# Altium PCB lampi_pcb -V3.PcbDoc
Units mil, origin at the board's own origin, x right, y up, seen from the top; angles counter-clockwise.
Board outline 1965 x 1570 mil, 2 copper layers (Top Layer, Bottom Layer); 39 components, 24 nets, 124 pads, 34 vias.
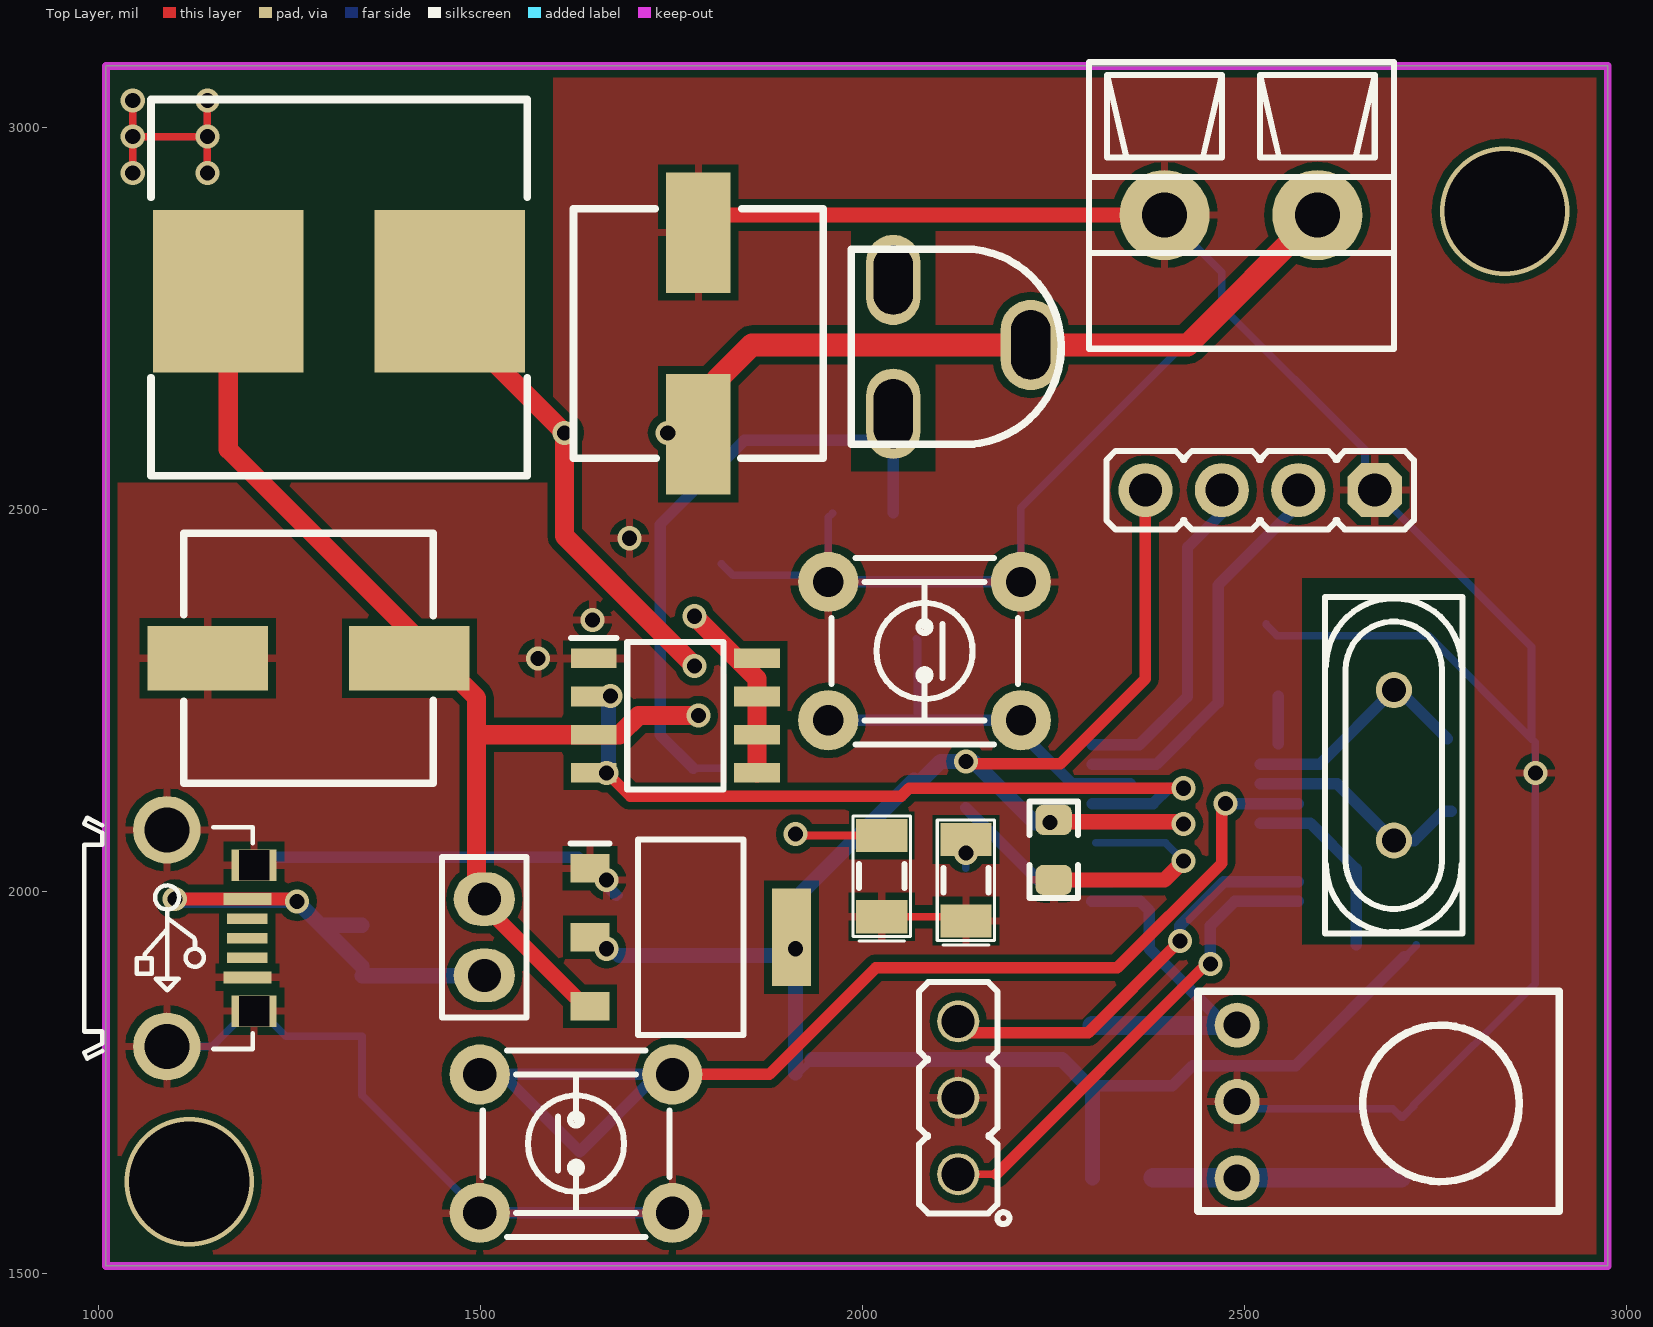
[diagram p0: Top Layer view]
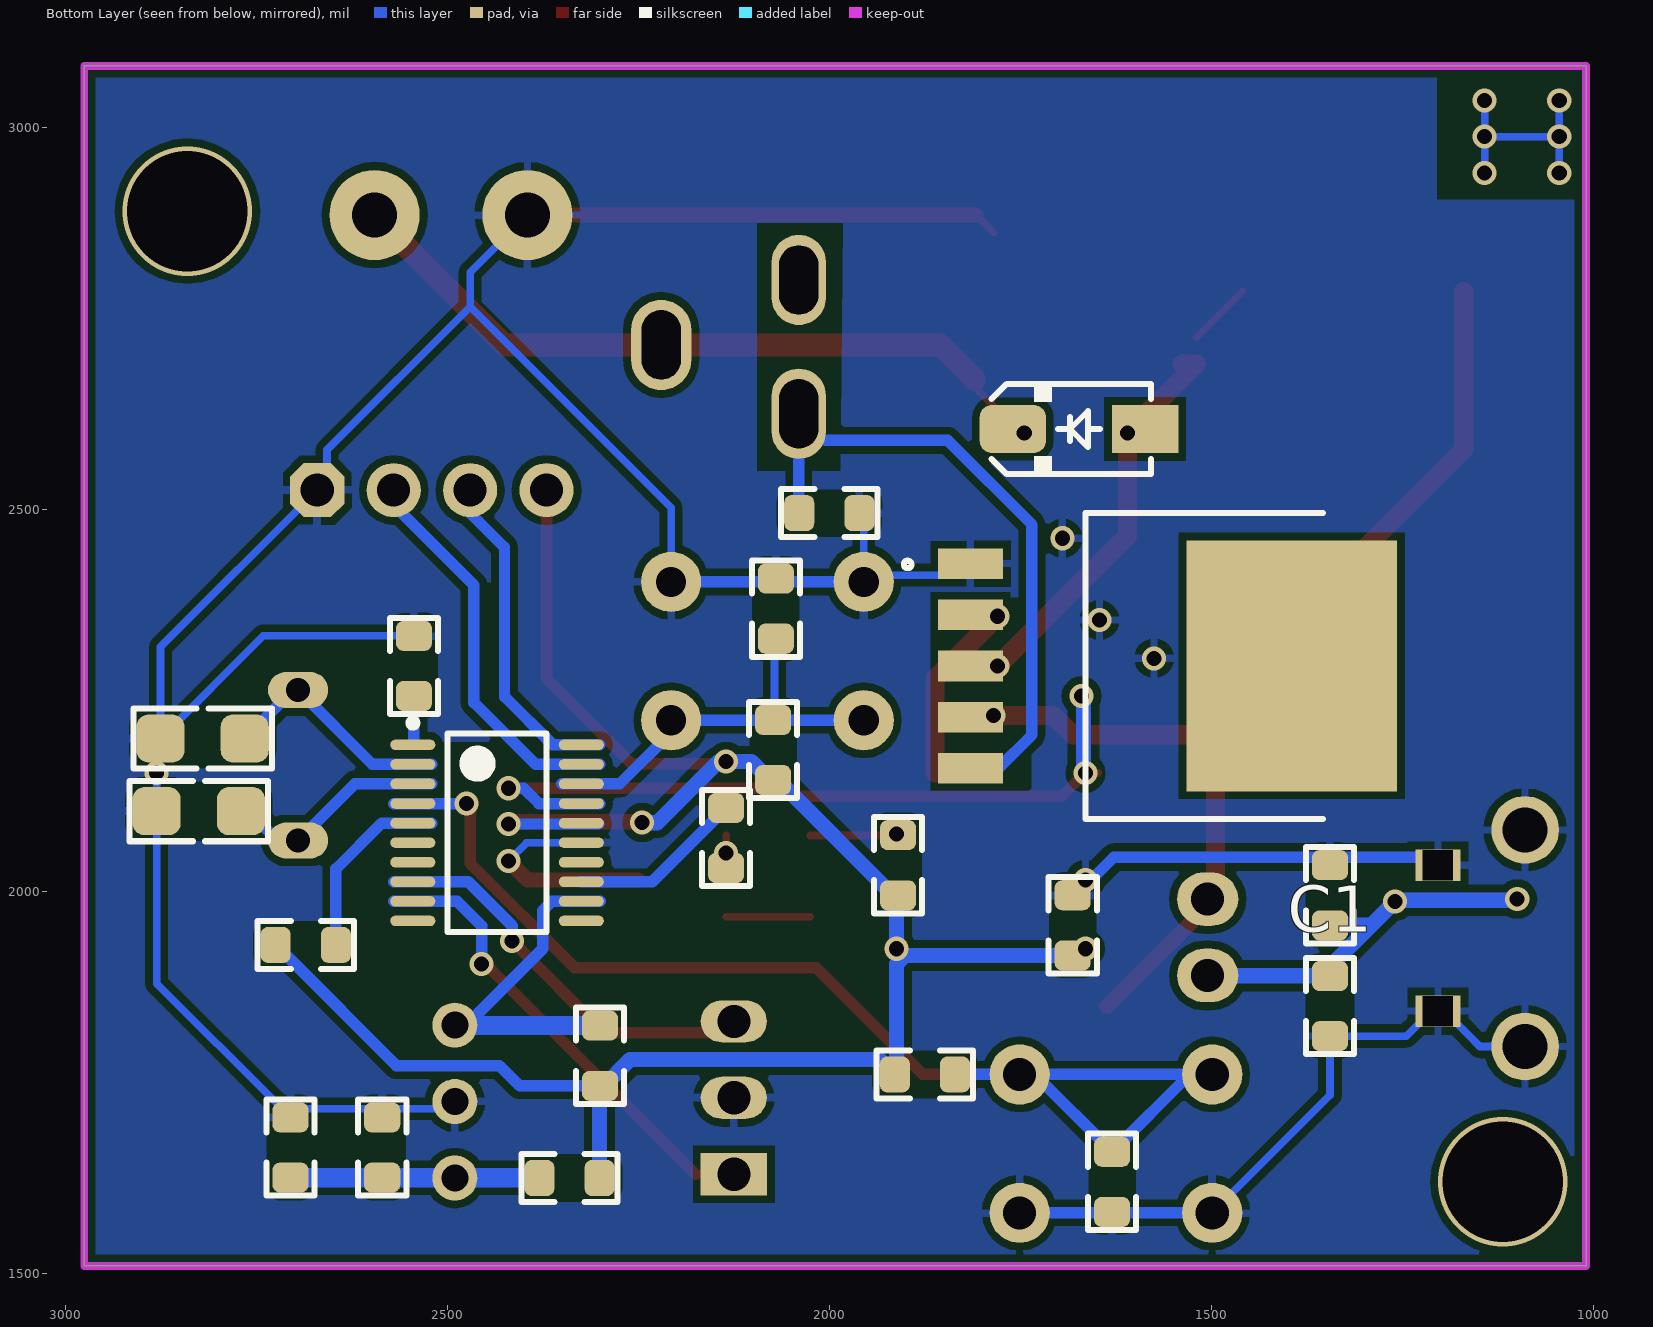
[diagram p1: Bottom Layer view, seen from below]
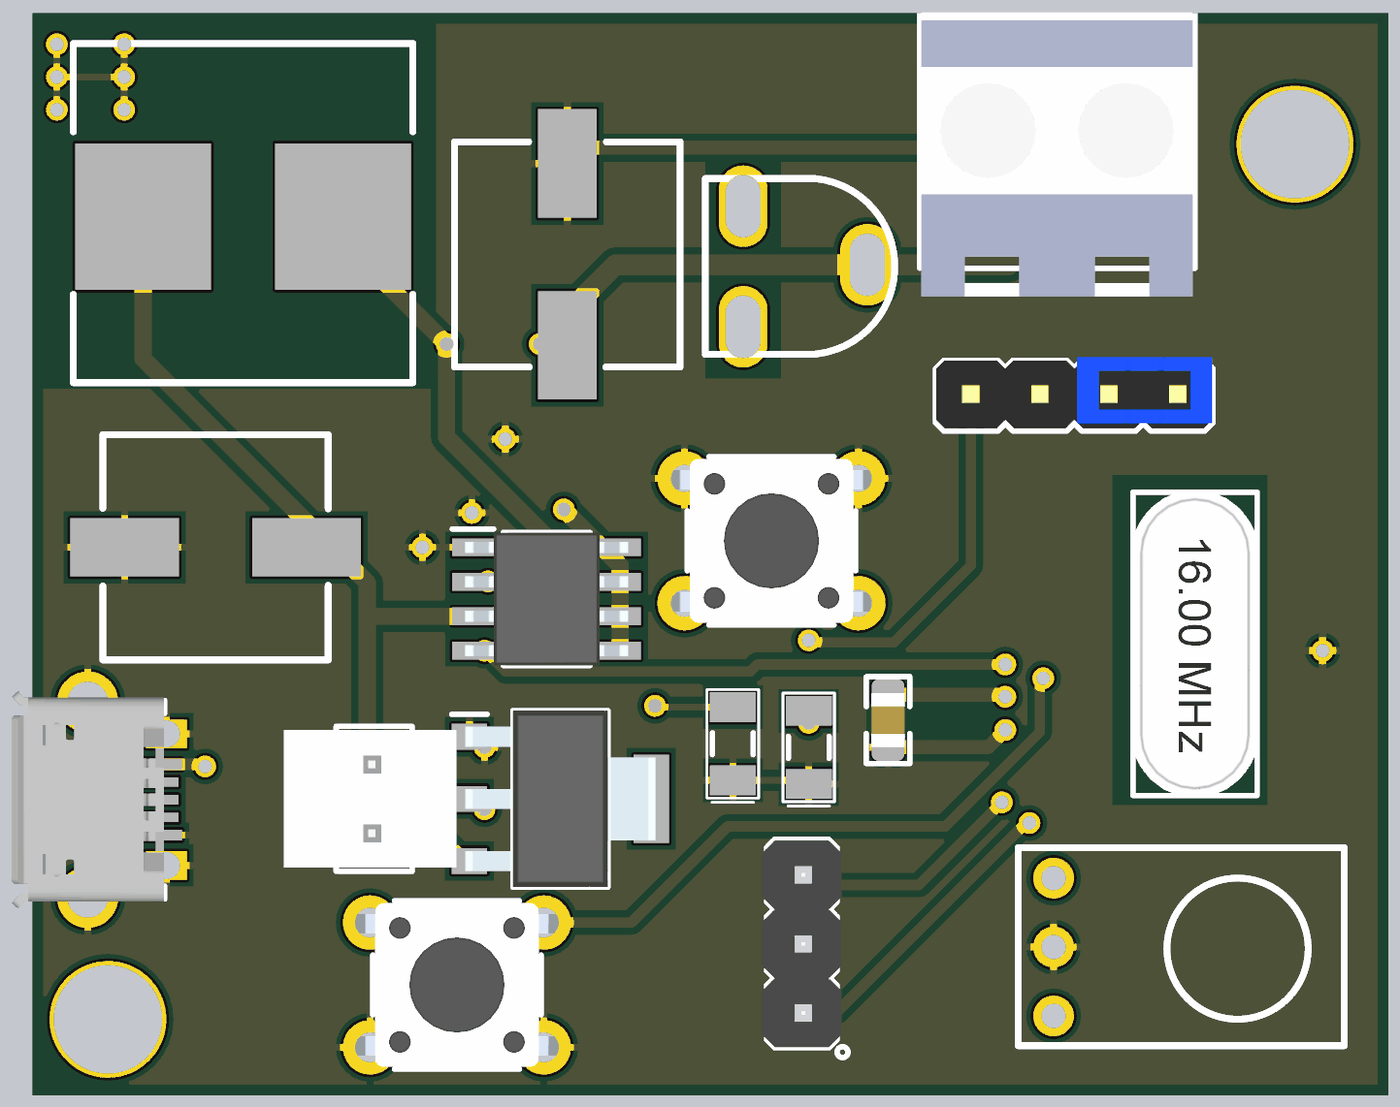
[diagram p2: 3D render of the assembled board from above, using the file's embedded part models]
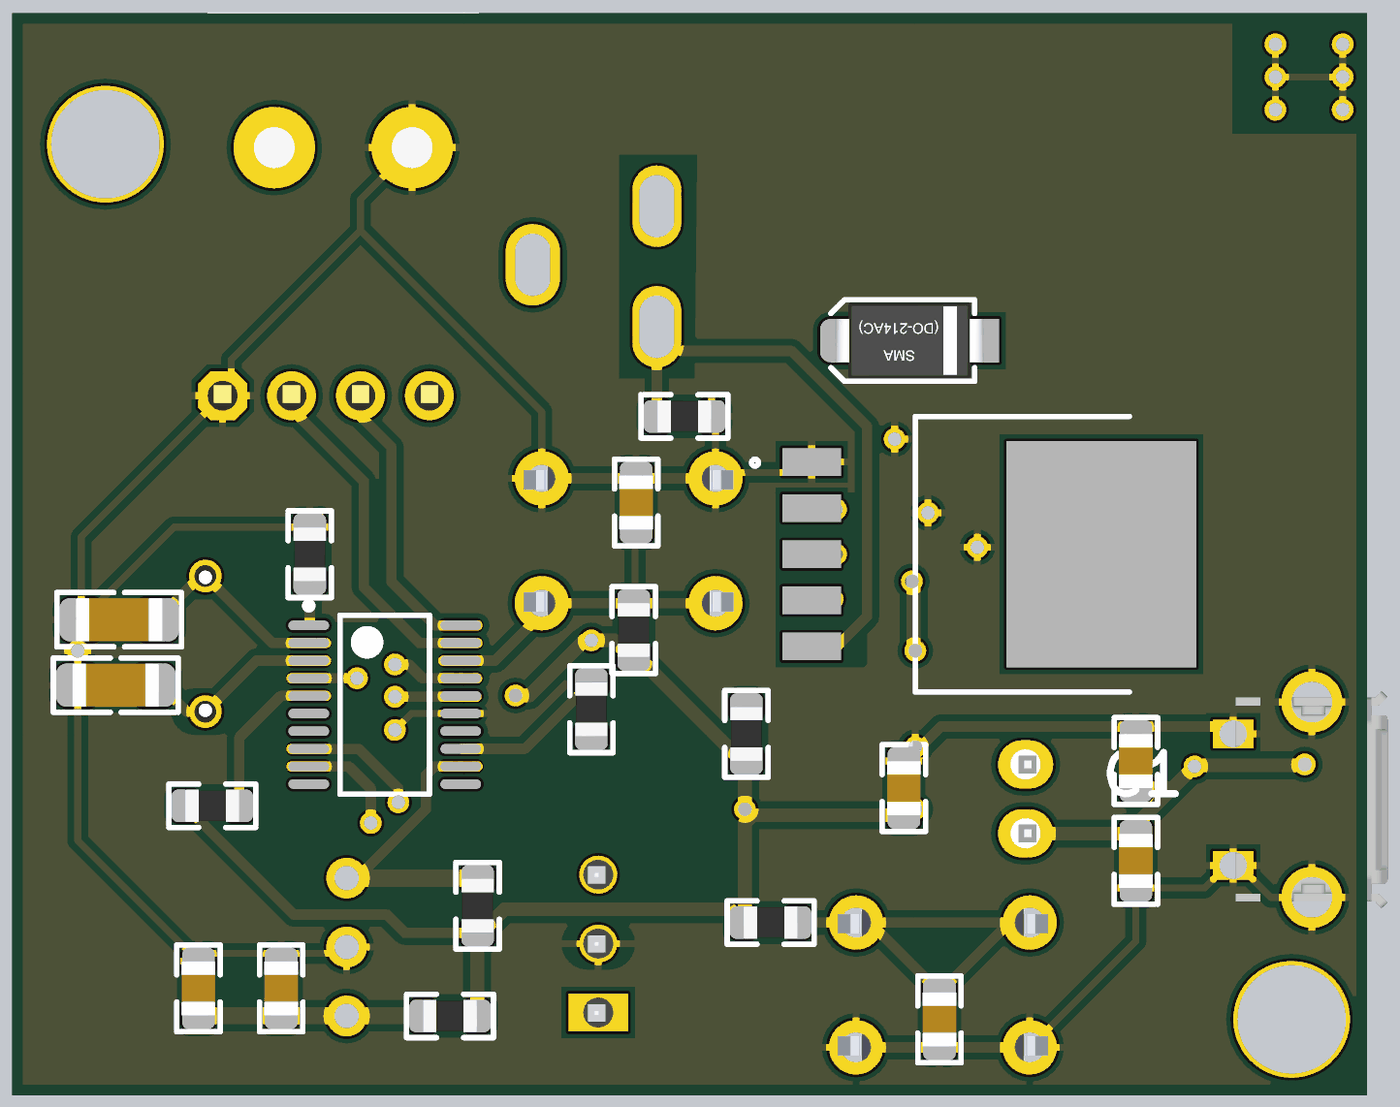
[diagram p3: 3D render of the assembled board from below, using the file's embedded part models]

## Layer stack, top to bottom
Top Solder: solder mask 0.4, Solder Resist, Dk 3.5
Top Layer: signal copper 1.4
Dielectric 1: dielectric 12.6, FR-4, Dk 4.8
Bottom Layer: signal copper 1.4
Bottom Solder: solder mask 0.4, Solder Resist, Dk 3.5

## Board outline
1010,1510 2975,1510 2975,3080 1010,3080

## Design rules (kind name [scope] priority, off if disabled: settings)
Clearance [All] p1: gap=10 ignorepadtopadclearanceinfootprint=FALSE except(0: Arc-Hole Track-Hole SMDPad-Hole THPad-Hole Via-Hole Fill-Hole Poly-Hole Region-Hole Text-Hole)
PolygonConnect [All] p1: connectstyle=Relief reliefconductorwidth=10 reliefentries=4 polygonreliefangle="90 Angle" airgapwidth=10
RoutingVias [All] p1: holewidth=28 width=50 viastyle="Through Hole" minholewidth=28 minwidth=50 maxholewidth=28 maxwidth=50
SolderMaskExpansion [All] p1: expansion=4
Width [All] p1: maxlimit=30 minlimit=10 preferedwidth=10 minimp=50.000000 maximp=50.000000 favimp=50.000000
30 further rules are at their usual default settings.

## Classes and differential pairs
component class Lampi: C1
component class lampi_power: " "

## Components (designator, comment, footprint, x,y, rotation, side; value= is the part's Value field where it differs from the comment)
C1 "100nF" 0805C 1345,1850 r90 bottom
C2 "100nF" 0805C 1681.61,1955.63 r270 bottom
C3 "20pF" 1206C 2820,2200 r0 bottom
C4 "10uF" 0805C 1345,1995 r270 bottom
C5 "20pF" 1206C 2825,2105 r0 bottom
C6 "100nF" 0805C 2070,2370 r270 bottom
C7 "100nF" 0805C 1630,1620 r90 bottom
C8 "100nF" 0805C 2250,2054.37 r90 top
C9 "100nf" 0805C 2705,1665 r90 bottom
C10 "10uf" 0805C 2585,1665 r90 bottom
C11 "C 220uF" UWT(8X10) 1275,2305 r180 top
C12 "100uF" UWT(8X10) 1785,2730 r90 top
D1 "LED" L1206 2025,2020 r270 top
D2 "LED" L1206 2135,2014.65 r270 top
D3 "1N5819" 430X270D 1673.39,2605 r0 bottom
"header 1" "HDR_BUSEL" HDR_1x3 2125,1730 r90 top
IC1 "ams1117-3.3v" SOT229P700X180-4N 1775,1940 r0 top
IC? "XL6009" KTT0005B 1324.68,2295 r0 bottom
J1 "Terminal" TB_2 2495,2885 r180 top
J5 "" HEADER_4_JMP 2520,2525 r180 top
JP1 "Header 2" "COMM HEADER 2" 1505,1940 r90 top
L1 "33UH" SRR1260-150M 1315,2790 r0 top
PT1 "POT3" POT3 1985,2840 r270 top
Q1 "IRF7317PBF" SOIC127P600X175-8N 1755,2230 r0 top
R1 "10k" 0805L 2073.5,2185 r270 bottom
R2 "10k" 0805L 1875,1760.55 r0 bottom
R3 "100" 0805L 2543.5,2295 r270 bottom
R4 "0" 0805L 2685,1930 r180 bottom
R5 "100" 0805L 1910,2034.29 r270 bottom
R6 "100" 0805L 2135,2070 r90 bottom
R7 "100R" 0805L 2340,1625 r180 bottom value=100r
R8 "22K OPTIONAL" 0805L 2300,1785 r90 bottom
"R 1k" "*" 0805L 2000,2495 r0 bottom
SM1 "PUSHBUTTON" PBTHD_4_6X6MM#1 2080.98,2314.45 r180 top
SM2 "PUSHBUTTON" PBTHD_4_6X6MM#2 1625,1670 r0 top
U1 "STM32F030F4P6" STM-TSSOP20_L 2434.76,2076.61 r180 bottom
uUSB "micro usb dip" MICRO_USB_DIP 1090.04,1938.82 r270 top
XM1 "8MHz" XTLT_2 2695,2165 r270 top
? "RYS1838T" RYS1838T 2709.49,1722.64 r270 top

## Footprints (in the part's own frame and the unit in brackets; to place one, negate y for a bottom-side part, rotate by r counter-clockwise, add the part's x,y. Pads: shape width x height; smd on the part's side, far side on the other; paste and mask are expansions set on the pad)
430X270D [mm] "SMA Molded Diode, 2-Leads, Body 4.3x2.7mm"
  rect 2.2x1.6 smd: 1(-2.2,0)
  rrect50% 2.2x1.6 smd: 2(2.2,0)
  silkscreen extent -2.4,-1.5 2.9,1.5, body extent -2.75,-1.4 2.75,1.4, height 2.6
0805C [mm] ",0805, 2012, 200X130"
  rrect50% 1x1.2 smd mask+0.075: 1(-1,0) 2(1,0)
  Top Layer pour cut-out: -0.5,0.8 0.5,0.8 0.5,-0.8 -0.5,-0.8
  silkscreen extent -1.6,-0.8 1.6,0.8, body extent -1,-0.62 1,0.62, height 1
0805L [mm] ",0805, 2012, 200X130"
  rrect50% 1x1.2 smd mask+0.075: 1(-1,0) 2(1,0)
  Top Layer pour cut-out: -0.5,0.8 0.5,0.8 0.5,-0.8 -0.5,-0.8
  silkscreen extent -1.6,-0.8 1.6,0.8, body extent -1,-0.6 1,0.6, height 0.95
1206C [mm] "Molded/Chip Capacitor, 2-Leads, Body 3.2x1.6mm, IPC Medium Density, 3216, 320X160"
  rrect50% 1.6x1.6 smd mask+0.075: 1(-1.4,0) 2(1.4,0)
  Top Layer pour cut-out: -0.8,1 -0.8,-1 0.8,-1 0.8,1
  silkscreen extent -2.3,-1 2.3,1, body extent -1.6,-0.8 1.6,0.8, height 1
"COMM HEADER 2" [mil] "Communication Header Connector 2 pin"
  oval 70x80 hole 43.31: 1(-50,0) 2(50,0)
  silkscreen extent -105,-55 105,55, body extent -100,-119 100,131, height 413
HDR_1x3 [mm]
  round 1.4 / inner rect 1.4x1.4 / far side rect 1.4x2.2 hole 1.1 mask+0.1: 1(-2.54,0)
  round 1.4 / inner round 1.4 / far side oval 1.4x2.2 hole 1.1 mask+0.1: 2(0,0) 3(2.54,0)
  silkscreen extent -4.2,-1.7 3.84,1.3, body extent -3.82,-1.46 3.8,1.46, height 8.61
HEADER_4_JMP [mm] "HEADER 4 PIN WITH JUMPER"
  oct 1.8x1.8 hole 1.1 mask+0.1: 1(-3.81,0)
  round 1.8 hole 1.1 mask+0.1: 2(-1.27,0) 3(1.27,0) 4(3.81,0)
  silkscreen extent -5.11,-1.3 5.11,1.3, body extent -5.08,-1.42 5.08,1.19, height 8.57
KTT0005B [mm]
  rect 2.16x1.02 smd: 1(12.461,-3.4) 2(12.461,-1.7) 3(12.461,0) 4(12.461,1.7) 5(12.461,3.4)
  rect 6.99x8.33 smd: 6(1.786,0)
  silkscreen extent 0.76,-5.08 14.68,5.08
L1206 [mm] "Body 3.2x1.6mm, IPC High Density"
  rect 1.1x1.7 smd: A(-1.35,0) K(1.35,0)
  silkscreen extent -2,-0.95 2.16,0.95, body extent -1.7,-0.9 1.7,0.9, height 1.3
MICRO_USB_DIP [mm]
  rect 0.4x1.6 smd: 1(-1.3,2.666) 5(1.3,2.666)
  rect 0.35x1.35 smd: 2(-0.65,2.666) 3(0,2.666) 4(0.65,2.666)
  rect 1.05x1.5 hole 1 square: 6(2.425,2.891) 9(-2.425,2.891)
  round 2.25 hole 1.5: 7(3.6,-0.009) 8(-3.6,-0.009)
  Mechanical 8 keep-out region: 3.75,-2.159 3.75,-0.759 -3.75,-0.759 -3.75,-2.159
  Mechanical 8 keep-out region: 2.85,-0.759 2.85,0.741 -2.85,0.741 -2.85,-0.759
  Mechanical 8 keep-out region: 3.75,0.741 3.75,1.941 -3.75,1.941 -3.75,0.741
  silkscreen extent -4,-2.76 4,2.84, body extent -4,-2.81 4,2.79, height 2.73
PBTHD_4_6X6MM#1 [mm] "TACTILE SWITCH 6X6mm 4PIN PBTHD500_4_S600"
  round 2 hole 1: 1(-3.2,2.3) 2(-3.2,-2.3) 3(3.2,-2.3) 4(3.2,2.3)
  silkscreen extent -3.1,-3.1 3.1,3.1, body extent -3.87,-3.01 3.87,3.02, height 5.01
PBTHD_4_6X6MM#2 [mm] "TACTILE SWITCH 6X6mm 4PIN PBTHD500_4_S600"
  round 2 hole 1.1: 1(-3.2,2.3) 2(-3.2,-2.3) 3(3.2,-2.3) 4(3.2,2.3)
  silkscreen extent -3.1,-3.1 3.1,3.1, body extent -3.87,-3.01 3.87,3.02, height 5.01
POT3 [mm]
  oval 3x1.8 hole 2.3 slot 1.3 at 90 deg: 1(1.016,1.397) 2(5.461,1.397)
  oval 3x2 hole 1.3 slot 2.3 at 0 deg: 3(3.175,5.969)
  silkscreen extent 0,0 6.48,6.98
RYS1838T [mm]
  round 1.5 hole 0.9: 1(-2.6,-5.575) 2(-0.06,-5.575) 3(2.48,-5.575)
  silkscreen extent -3.72,-6.88 3.57,5.13
SOIC127P600X175-8N [mm]
  rect 1.525x0.65 smd: 1(-2.712,1.905) 2(-2.712,0.635) 3(-2.712,-0.635) 4(-2.712,-1.905) 5(2.712,-1.905) 6(2.712,-0.635) 7(2.712,0.635) 8(2.712,1.905)
  silkscreen extent -3.47,-2.45 1.6,2.58, body extent -3,-2.45 3,2.45, height 1.75
SOT229P700X180-4N [mm]
  rect 1.3x0.95 smd: 1(-3.35,2.29) 2(-3.35,0) 3(-3.35,-2.29)
  rect 1.3x3.25 smd: 4(3.35,0)
  silkscreen extent -4,-3.25 1.75,3.25, body extent -3.5,-3.25 3.5,3.25, height 1.8
SRR1260-150M [mil]
  rect 196.85x212.6 smd: 1(-145,-5) 2(145,-5)
  silkscreen extent -246,-246 246,246
STM-TSSOP20_L [mm] "SOP, 20-Leads, Body 6.6x4.5mm, Pitch 0.65mm, IPC High Density"
  oval 1.5x0.35 smd: 1(-2.8,2.925) 2(-2.8,2.275) 3(-2.8,1.625) 4(-2.8,0.975) 5(-2.8,0.325) 6(-2.8,-0.325) 7(-2.8,-0.975) 8(-2.8,-1.625) 9(-2.8,-2.275) 10(-2.8,-2.925) 11(2.8,-2.925) 12(2.8,-2.275) 13(2.8,-1.625) 14(2.8,-0.975) 15(2.8,-0.325) 16(2.8,0.325) 17(2.8,0.975) 18(2.8,1.625) 19(2.8,2.275) 20(2.8,2.925)
  silkscreen extent -2.93,-3.3 1.65,3.77, body extent -2.25,-3.3 2.25,3.3, height 1.2
TB_2 [mm] "Terminal Block"
  round 3 hole 1.5: 1(-2.54,0) 2(2.54,0)
  silkscreen extent -5.08,-5.08 5.05,4.45, body extent -5,-5 5,5.5, height 14
UWT(8X10) [mm]
  rect 4x2.15 smd: 1(-3.35,0) 2(3.35,0)
  silkscreen extent -4.15,-4.15 4.15,4.15
XTLT_2 [mm] "Crystal PTH HC49S"
  round 1.2 / inner oval 1.2x2 / far side oval 1.2x2 hole 0.8: 1(-2.5,0)
  round 1.2 / inner round 1.2 / far side oval 1.2x2 hole 0.8: 2(2.5,0)
  silkscreen extent -5.59,-2.29 5.59,2.29, body extent -5.67,-2.32 5.67,2.33, height 3.6

## Part data
C1 C2 C8: library part Cap
C3 C5 C6 C7 C9 C10: library part Cap, "Capacitor"
C4: library part Cap, "100nF"
C11 C12: library part UCW1V221MNL1GS, "Capacitor Polarised", Manufacturer_Name=Nichicon, Mouser Part Number=647-UCW1V221MNL1GS, RS Part Number=7151745P, Allied_Number=70409419, Allied Price/Stock=https://www.alliedelec.com/nichicon-ucw1v221mnl1gs/70409419/, Datasheet Link=http://www.nichicon.co.jp/english/products/pdfs/e-ucw.pdf, Manufacturer_Part_Number=UCW1V221MNL1GS, Mouser Price/Stock=https://www.mouser.com/Search/Refine.aspx?Keyword=647-UCW1V221MNL1GS, RS Price/Stock=http://uk.rs-online.com/web/p/products/7151745P
"header 1": library part "header 1x3"
IC1: "Integrated Circuit", Manufacturer_Name="Advanced Monolithic Systems", Datasheet Link=http://www.advanced-monolithic.com/pdf/ds1117.pdf, Height=1.8mm, Manufacturer_Part_Number=ams1117-3.3v
IC?: "Integrated Circuit", Manufacturer_Name="Texas Instruments", Manufacturer_Part_Number=LM2577SX-ADJ/NOPB, Mouser Part Number=926-LM2577SXADJNOPB, Datasheet Link=http://www.ti.com/lit/gpn/LM2577, Mouser Price/Stock=https://www.mouser.com/Search/Refine.aspx?Keyword=926-LM2577SXADJNOPB
J1: library part CON2
J5: library part "Header 4", "Header, 4-Pin", LatestRevisionDate=17-Jul-2002, LatestRevisionNote="Re-released for DXP Platform.", Publisher="Altium Limited"
JP1: "Header, 2-Pin", LatestRevisionDate=17-Jul-2002, LatestRevisionNote="Re-released for DXP Platform.", Publisher="Altium Limited"
L1: library part SRR1260-330M, "Inductor", Manufacturer_Name=Bourns, Mouser Part Number=652-SRR1260-330M, RS Part Number=6934619P, Allied_Number=70277066, Allied Price/Stock=https://www.alliedelec.com/bourns-srr1260-330m/70277066/, Datasheet Link=https://www.bourns.com/docs/Product-Datasheets/SRR1260.pdf, Manufacturer_Part_Number=SRR1260-330M, Mouser Price/Stock=https://www.mouser.com/Search/Refine.aspx?Keyword=652-SRR1260-330M, RS Price/Stock=http://uk.rs-online.com/web/p/products/6934619P
PT1: "Variable Potentiometer top adjust", Designer="Seyed Mohsen Ghasemian", WEB=www.picpars.com
Q1: "Transistor", Manufacturer_Name=Infineon, Mouser Part Number=942-IRF7317PBF, RS Part Number=5410317P, Allied_Number=70018231, Allied Price/Stock=https://www.alliedelec.com/infineon-irf7317pbf/70018231/, Datasheet Link=http://www.infineon.com/dgdl/irf7317pbf.pdf?fileId=5546d462533600a4015355f5b8de1b3d, Height=1.75mm, Manufacturer_Part_Number=IRF7317PBF, Mouser Price/Stock=https://www.mouser.com/Search/Refine.aspx?Keyword=942-IRF7317PBF, RS Price/Stock=http://uk.rs-online.com/web/p/products/5410317P
R1 R2 R3 R4 R5 R6 R7 R8 "R 1k": library part R
SM1 SM2: library part PUSHBUTTON4, "SWITCH TACT 6MM 100GF SMD", ASSEMBLY=ASSEMBLY, DESC=DESCRIPTION, MANF=ESWITCH, MANF_PART#=TL3301EF100QG, PARAM=PARAM, PRICE=PRICE
U1: "ARM Cortex-M0 32-bit MCU, 16 KB Flash, 4 KB Internal RAM, 15 I/Os, 20-pin TSSOP, -40 to 85 degC, Tube", I/Os (High Current)=15, Operating Frequency(F) (Processor speed) (MHz)=48, Supplier Part Number 1=497-14044-5-ND, Supply Voltage(Vcc) min (V)=2.4, ComponentLink1Description="Manufacturer URL", ComponentLink1URL=http://www.st.com/web/en/home.html, ComponentLink2Description=Datasheet, ComponentLink2URL=http://www.st.com/st-web-ui/static/active/en/resource/technical/document/datasheet/DM00088500.pdf, ComponentLink3Description="Package Specification", ComponentLink3URL=http://www.st.com/st-web-ui/static/active/en/resource/technical/document/datasheet/DM00065136.pdf, Core="ARM Cortex-M0", DatasheetVersion="Rev. 1", FLASH Size (Prog) (kB)=16, Internal RAM Size (kB)=4, Mounting Technology="Surface Mount", PackageDescription="20-Pin Thin Shrink Small Outline Package, 6.5 x 4.4 mm Body, 0.65 mm Pitch", PackageReference=TSSOP20, PackageVersion="Rev. 1, 11/2012", Packing=Tube, PartNumber=STM32F030F4P6, Supplier 1=Digi-Key, Supplier 2=Newark, Supplier 3=Mouser, Supplier Part Number 2=06X3648, Supplier Part Number 3=511-STM32F030F4P6
XM1: library part XTAL

## Via types
v1: diameter 31.5, hole 19.68, Top Layer to Bottom Layer, 32 vias
v2: diameter 169.29, hole 157.48, Top Layer to Bottom Layer, 2 vias

## Nets (pads, with @x,y where several pads share a name; then routed paths per layer and width w, separated by ;. In a path a pad name is that pad's centre, name@x,y a point inside that pad or via, vN(x,y) a via of type N, cw(c..) or ccw(c..) an arc to the next point about the centre after c; other vN are vias at no path point)
3V: C2.2 C8.2 IC1.2 IC1.4 J5.4 R1.2 R2.2 R4.1 R5.2 R7.2 R8.1 U1.16 | length 2740.9
  Top Layer w10: C8.2 C8.2@2252.77,2090.97 ; v1@2417.23,2090.97 v1(2420,2088.21)
  Top Layer w15: v1(2135,2170) 2137.97,2167.03 2258.8,2167.03 2370,2278.23 J5.4
  Top Layer w20: C8.2@2252.77,2090.97 v1@2417.23,2090.97
  Bottom Layer w10: R5.2 R5.2@1916.4,1994.92 ; R2.2@1912.19,1762.74 R2.2 1933.82,1780 ; R1.2@2067.11,2145.63 R1.2 R1.2@2077.44,2145.63 ; R4.1@2708.74,1914.37 2710.05,1914.37 2724.37,1928.68 R4.1
  Bottom Layer w15: R8.1@2295.1,1745.63 R8.1 2405.31,1745.63 2431.71,1772.03 2566.4,1772.03 R4.1@2708.74,1914.37 ; U1.16@2301.79,2088.21 v1(2420,2088.21)
  Bottom Layer w20: C2.2 1900.93,1916.26 1912.19,1905 R2.2@1912.19,1762.74 ; v1(1912.19,1925) R5.2@1912.19,1992.73 ; R5.2@1916.4,1994.92 R1.2@2067.11,2145.63 ; 1933.82,1780 2260.73,1780 2295.1,1745.63 2300.63,1740.1 R7.2 ; R1.2@2077.44,2145.63 2101.81,2170 v1(2135,2170) 2145,2170 2225,2090 v1(2245,2090)
  other v1: 1665,1925
5USB: C11.1 IC1.3 IC?.4 JP1.2 L1.1 Q1.3 | length 1443.4
  Top Layer w10: JP1.2@1495,1990 JP1.2 JP1.2@1505,1981.06 ; IC1.3@1636.22,1849.84 IC1.3
  Top Layer w20: JP1.2@1505,1981.06 IC1.3@1636.22,1849.84
  Top Layer w25: L1.1 1170,2578.31 1495,2253.31 1495,2210 ; JP1.2@1495,1990 1495,2210 ; v1(1785,2230) 1706.62,2230 1681.62,2205 Q1.3 1500,2205 1495,2210
EN: IC?.2 Q1.5 Q1.6 Q1.7 Q1.8 | length 238.9
  Top Layer w25: v1(1780,2360) 1861.77,2278.23 Q1.7 Q1.6 Q1.5
GND: "header 1.2" "R 1k.1" ?.2 C1.1 C2.1 C3.2 C4.1 C5.2 C6.1 C7.1 C8.1 C9.2 C10.2 C11.2 C12.2 D1.K D2.K IC1.1 IC?.1 J1.2 J5.1 Q1.1 R3.1 SM1.2 SM1.3 SM2.2 SM2.3 U1.15 uUSB.5 uUSB.6 uUSB.7 uUSB.8 uUSB.9 | length 5431.3
  Top Layer w10: C12.2 C12.2@1808.11,2885 ; D1.K D2.K@2135,1966.85 ; 2125,1730 2127.5,1727.5 ; ?.2@2487.5,1727.5 ?.2
  Top Layer w20: C12.2@1808.11,2885 J1.2 ; C8.1 2395,2015 v1(2420,2040)
  Bottom Layer w10: uUSB.7 1148.98,1797.09 1164.16,1812.26 1164.16,1812.51 1195,1843.35 uUSB.6 1212.72,1843.35 1245.44,1810.63 C1.1 1345,1733.46 SM2.2 ; uUSB.9 uUSB.9@1214.57,2045 ; C2.1@1677.68,1995 C2.1 ; IC?.1 1830.35,2413.78 1946.22,2413.78 SM1.3 1955,2489.37 1960.63,2495 ; SM1.2 2206.97,2501.97 2470,2765 ; U1.15@2305,2063.82 U1.15 2396.18,2063.82 v1(2420,2040) ; J1.2 2470,2810 2470,2765 ; ?.2 2499.39,1715.61 2693.76,1715.61 C9.2 2706.32,1704.37 2720.63,1718.69 2720.63,1720 2880.12,1879.49 C5.2 2880.12,2195 C3.2 ; R3.1@2527.87,2350 2527.87,2348.69 2542.19,2334.37 R3.1 2740.75,2334.37 C3.2 ; 2470,2765 2657.28,2577.72 2657.28,2537.72 J5.1 2875.12,2319.88 C3.2
  Bottom Layer w15: uUSB.9@1214.57,2045 1627.68,2045 C2.1@1677.68,1995 ; SM2.2 SM2.3 ; SM1.3 SM1.2
  other v1: 1665,2015 2880.12,2155 1575,2305 1646.64,2355 1695,2462.05
IR_R: ?.1 R8.2 U1.12 | length 476.7
  Bottom Layer w10: R8.2 R8.2@2300.32,1824.69 ; ?.1@2489.69,1824.69 ?.1
  Bottom Layer w15: U1.12@2300,1987.05 U1.12 2362.95,1987.05 2375,1975 2375,1925 2469.3,1830.7 2484.3,1830.7 ?.1
  Bottom Layer w25: R8.2@2300.32,1824.69 2469.3,1824.69 ?.1@2489.69,1824.69
LEARN: C6.2 R1.1 SM1.1 SM1.4 U1.18 | length 546.5
  Bottom Layer w10: C6.2 2071.75,2328.88 2071.75,2226.12 R1.1
  Bottom Layer w15: SM1.4 2071.75,2223.9 SM1.1 2206.97,2208.03 2274.41,2140.59 U1.18 U1.18@2350,2140.59
LEARN_led: R6.2 U1.13 | length 229.6
  Bottom Layer w15: R6.2 2231.73,2012.64 U1.13
LED_Driver: Q1.2 Q1.4 U1.17 | length 1018.9
  Top Layer w10: Q1.4 v1(1665,2155) Q1.4@1665.45,2155
  Top Layer w15: Q1.4@1665.45,2155 1695.75,2124.7 2050.49,2124.7 2060.79,2135 v1(2420,2135)
  Bottom Layer w10: v1(1665,2155) v1@1667.5,2157.5 ; v1@1667.5,2253.13 v1(1670,2255.63)
  Bottom Layer w15: U1.17@2300.63,2115 U1.17 2380,2115 2400,2135 v1(2420,2135)
  Bottom Layer w20: v1@1667.5,2157.5 v1@1667.5,2253.13
Net_3: ?.3 C9.1 C10.1 R7.1 | length 325.9
  Bottom Layer w10: R7.1 R7.1@2379.69,1625.32 ; C9.1@2704.69,1625.32 C9.1
  Bottom Layer w25: R7.1@2379.69,1625.32 C9.1@2704.69,1625.32
NetC12_1: C12.1 D3.2 J1.1 PT1.3 | length 956.3
  Top Layer w10: C12.1 1785,2634.53 1810,2659.53 C12.1@1810,2670
  Top Layer w30: C12.1@1810,2670 1855,2715 PT1.3 2425,2715 J1.1
  other v1: 1745,2600
NetD1_A: D1.A R5.1 | length 113.6
  Top Layer w10: v1(1912.19,2075) 1914.04,2073.15 D1.A
NetD2_A: D2.A R6.1 | length 25
  Top Layer w10: D2.A D2.A@2135,2073.15
  Bottom Layer w10: R6.1 v1(2135,2050.32)
NetD3_1: D3.1 IC?.3 L1.2 | length 605.9
  Top Layer w10: L1.2 L1.2@1520,2725
  Top Layer w25: L1.2@1538.39,2690 1520,2690 v1(1610,2600) 1610,2465 v1(1780,2295)
NetIC?_5: "R 1k.2" IC?.5 PT1.2 | length 868.9
  Bottom Layer w10: IC?.5@1778.54,2161.14 IC?.5 ; 2005,2590 PT1.2 ; 2039.37,2495 2040,2495.63
  Bottom Layer w15: IC?.5@1778.54,2161.14 1735,2204.68 1735,2480 1845,2590 2005,2590 ; 2040,2495.63 PT1.2
NetR3_2: R3.2 U1.1 | length 64.5
  Bottom Layer w10: U1.1@2543.5,2193.27 U1.1
  Bottom Layer w15: U1.1@2543.5,2193.27 R3.2
NetR4_2: R4.2 U1.5 | length 249.9
  Bottom Layer w15: U1.5@2520,2089.41 U1.5 2585.59,2089.41 2645.63,2029.37 R4.2
NRST: C7.2 R2.1 SM2.1 SM2.4 U1.4 | length 1619.3
  Top Layer w15: SM2.4 1877.91,1760.55 2017.36,1900 2332.98,1900 2470,2037.02 v1@2470,2105
  Bottom Layer w10: SM2.1 SM2.1@1528.82,1760.55 ; SM2.4@1731.18,1760.55 SM2.4
  Bottom Layer w15: SM2.4 R2.1 ; v1(2475,2115) U1.4 U1.4@2570,2115 ; SM2.1@1528.82,1760.55 1731.18,1760.55 C7.2 SM2.1@1528.82,1760.55
OSC_IN: C3.1 U1.2 XM1.1 | length 311.4
  Bottom Layer w15: U1.2@2520,2166.18 U1.2 2597.76,2166.18 XM1.1 2701.46,2263.43 C3.1
OSC_OUT: C5.1 U1.3 XM1.2 | length 296.5
  Bottom Layer w15: U1.3@2520,2140.59 U1.3 2620.98,2140.59 XM1.2 2721.57,2066.57 2760,2105 C5.1
Rx: "header 1.1" U1.9 | length 617.2
  Top Layer w10: 2125,1630 2175,1630
  Top Layer w15: 2175,1630 v1@2450,1905
  Bottom Layer w15: v1(2455,1905) 2455,1955 2487.05,1987.05 U1.9 U1.9@2570,1987.05
SWCLK: J5.3 U1.20 | length 439.5
  Bottom Layer w15: U1.20@2300.32,2191.77 U1.20 2361.77,2191.77 2425,2255 2425,2450 2470,2495 J5.3
SWDIO: J5.2 U1.19 | length 519.6
  Bottom Layer w15: U1.19@2300.32,2166.18 U1.19 2384.16,2166.18 2465,2247.02 2465,2400.63 2570,2505.63 J5.2
Tx: "header 1.3" U1.8 | length 544.7
  Top Layer w10: 2125,1830 2140,1815
  Top Layer w15: 2140,1815 2295,1815 v1(2415,1935)
  Bottom Layer w15: v1(2415,1935) 2415,1955 2472.5,2012.5 2545,2012.5 U1.8@2570,2012.5
USB: C1.2 C4.2 JP1.1 uUSB.1 | length 670
  Top Layer w17: v1(1100,1990) uUSB.1
  Top Layer w17.01: uUSB.1 v1@1260,1990
  Top Layer w20: v1@1260,1990 v1@1261.48,1988.52
  Bottom Layer w10: v1(1100,1990) v1@1101.48,1988.52 ; v1@1258.52,1988.52 v1(1260,1987.05) ; C1.2@1345,1902.05 C1.2 C1.2@1345.31,1889.69 ; JP1.1@1504.69,1889.69 JP1.1
  Bottom Layer w20: v1@1101.48,1988.52 v1@1258.52,1988.52 ; v1(1260,1987.05) 1291.42,1955.63 ; C1.2@1345,1902.05 1291.42,1955.63 ; C4.2 1291.42,1955.63 ; C1.2@1345.31,1889.69 JP1.1@1504.69,1889.69
pads on no net: IC?.6 PT1.1 U1.6 U1.7 U1.10 U1.11 U1.14 uUSB.2 uUSB.3 uUSB.4
copper on no net: | length 622.7
  Top Layer w10: v1(1045,2940) v1(1045,3035) ; v1(1045,2987.5) v1(1142.59,2987.5) ; v1(1142.59,2940) v1(1142.59,3035)
  Bottom Layer w10: v1(1045,2940) v1(1045,3035) ; v1(1045,2987.5) v1(1142.59,2987.5) v1(1142.59,2940) v1(1142.59,3035)
  other v2: 1119.06,1620 2840,2890

## Polygon pours and split planes (outlines as drawn)
GND on Top Layer (solid, remove dead copper, pour order 8): 1010,3080 1010,1510 2975,1510 2970,1515 2970,3080
GND on Bottom Layer (solid, remove dead copper, pour order 10): 1010,1510 1010,3080 2975,3080 2975,1510

## Keep-outs
Keep-Out Layer:
  the board outline again, w10

## Other copper
Top Layer:
  pour cut-out: 2575,2410 2800,2410 2800,1930.97 2575.97,1930.97 2575,1930
  pour cut-out: 1985,2885 2095,2885 2095,2550 1985,2550
  pour cut-out: 1010,3080 1595,3080 1595,2530 1590,2535 1010,2535
Bottom Layer:
  pour cut-out: 1010,3080 1205,3080 1205,2905 1010,2905
  pour cut-out: 2345.93,2195.97 2540.8,2195.97 2545,2191.77 2545,1961.46 2348.54,1961.46 2345,1965
  pour cut-out: 1735,2385 1870,2385 1867.8,2382.8 1867.8,2131.06 1738.94,2131.06 1735,2135
  pour cut-out: 1981.54,2875 2095,2875 2095,2550 1985,2550